# EAGLE board old_kaya-insolev1 (EAGLE 8.6.0)
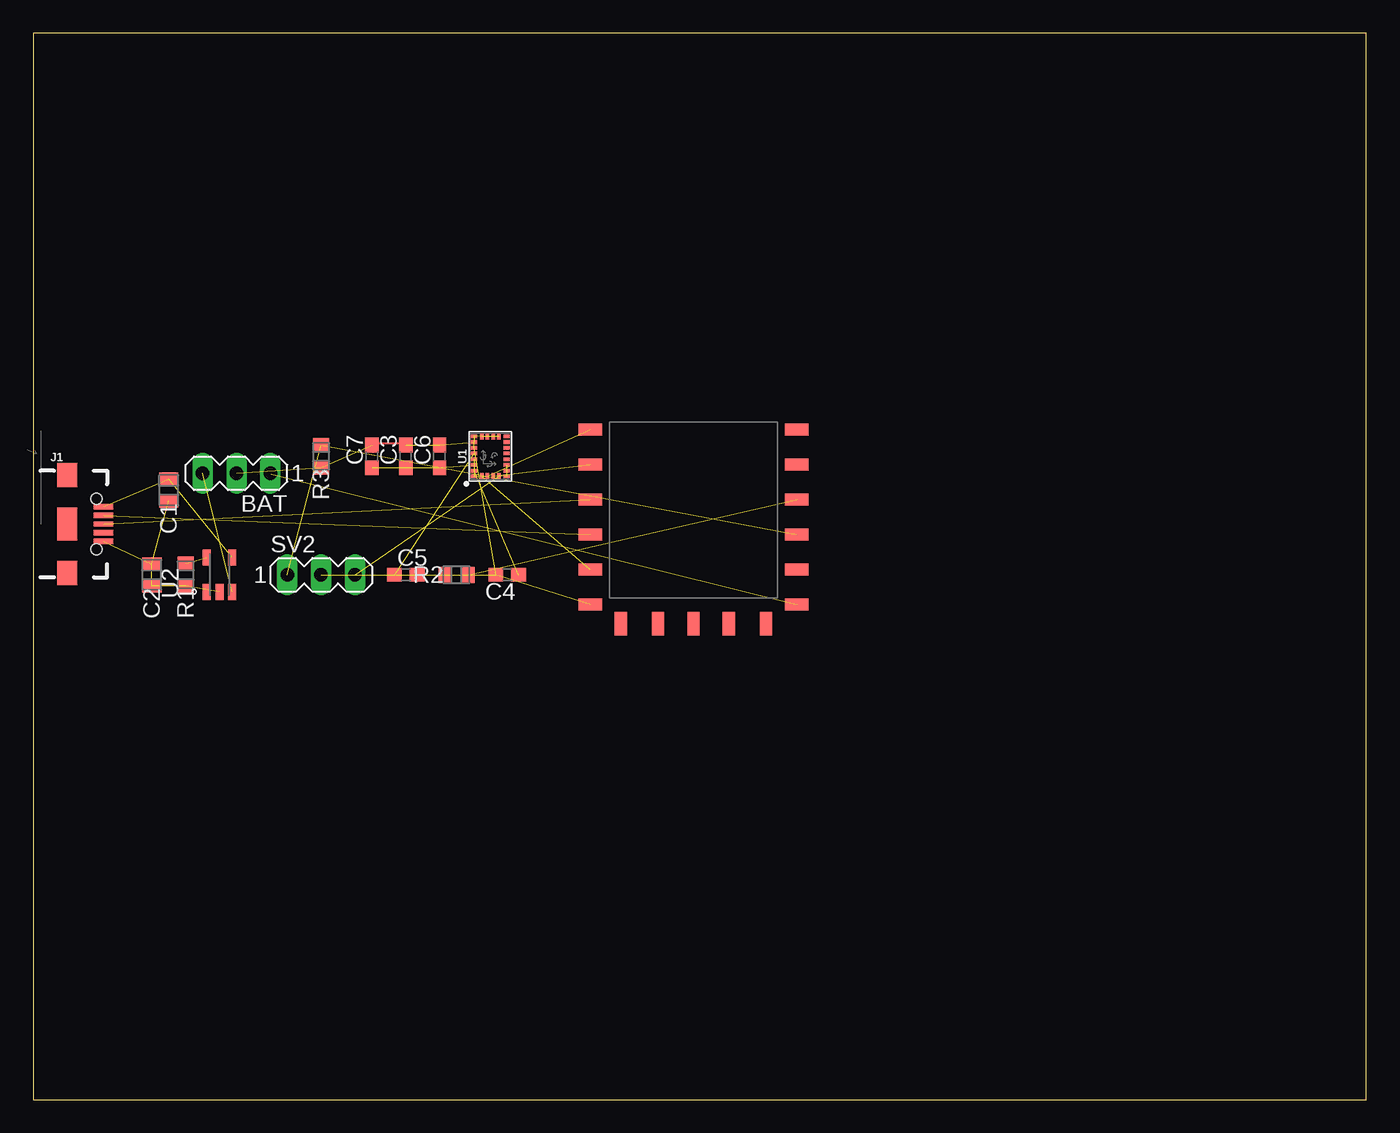
[diagram p0: board, top side]

Size 100 x 80 mm. Coordinates in mm from the lower left corner, seen from the top.
Outline: 0,0 100,0 100,80 0,80 0,0
Copper layers (1*16): Top 0.035mm / dielectric 1.5mm / Bottom 0.035mm
Design rules "default": minimum track width 6mil, minimum drill 0.35mm, track to track 6mil, track to pad 6mil, pad to pad 6mil, via to via 6mil, smd to smd 6mil, copper to edge 40mil, drill to drill 6mil, minimum pad ring 10mil, minimum via ring 8mil, stop-mask expansion 4mil, vias tented up to drill 0mil, thermal gap 10mil
tKeepout: area 43.2,36.8 to 55.9,50.8
bKeepout: area 43.2,36.8 to 55.9,50.8
tRestrict: area 43.2,36.8 to 55.9,50.8
bRestrict: area 43.2,36.8 to 55.9,50.8
vRestrict: area 43.2,36.8 to 55.9,50.8

## Footprints (pad centres in the part's own frame; a part is rotated, then mirrored left to right if it is on the bottom)
MA03-1 = drill 1.016 long: 1 -2.54,0; 2 0,0; 3 2.54,0
YAG_CC0805 = smd 0.965 x 1.448: 1 -0.826,0; 2 0.826,0
C0603 = smd 1.1 x 1: 1 -0.85,0; 2 0.85,0
USB-B-MICRO-SMD = smd 1.45 x 0.4: D+ 2.725,0; D- 2.725,0.65; GND 2.725,-1.3; ID 2.725,-0.65; VBUS 2.725,1.3 | smd 1.5 x 1.8: SHIELD1 0,3.685; SHIELD2 0,-3.685 | smd 1.5 x 2.5: SHIELD3 0,0 | hole 0.85: 2.2,1.9; 2.2,-1.9
RC0805N = smd 1.006 x 1.2: 1 -0.853,0; 2 0.853,0
LGA-24-3.5X3 = smd 0.27 x 0.45: 1 -1.505,1.225; 6 -1.505,-1.225; 7 -1.075,-1.225; 8 -0.645,-1.225; 9 -0.215,-1.225; 10 0.215,-1.225; 11 0.645,-1.225; 12 1.075,-1.225; 13 1.505,-1.225; 18 1.505,1.225; 19 1.075,1.225; 20 0.645,1.225; 21 0.215,1.225; 22 -0.215,1.225; 23 -0.645,1.225; 24 -1.075,1.225 | smd 0.45 x 0.27: 2 -1.475,0.645; 3 -1.475,0.215; 4 -1.475,-0.215; 5 -1.475,-0.645; 14 1.475,-0.645; 15 1.475,-0.215; 16 1.475,0.215; 17 1.475,0.645
SOT23-5 = smd 1.2 x 0.6: 1 -1.306,0.95; 2 -1.306,0; 3 -1.306,-0.95; 4 1.306,-0.95; 5 1.306,0.95
BLE-NANO-PKG = smd 1.778 x 0.914: A3 7.75,4.375; A4 7.75,1.75; GND$6 -7.75,-3.5; GND$8 7.75,-0.875; RXD -7.75,1.75; SCL -7.75,-0.875; SDA -7.75,7; SWCLK 7.75,9.625; SWDIO 7.75,7; TXD -7.75,4.375; VDD -7.75,9.625; VIN 7.75,-3.5 | smd 0.914 x 1.778: P06 2.65,-4.95; P07 5.45,-4.95; P15 0,-4.95; P28 -5.45,-4.95; P29 -2.65,-4.95

## Placement (x,y rotation side)
BAT  [MA03-1]  15.24,46.99 180 top
C1  CC0805ZRY5V6BB475  [YAG_CC0805]  10.16,45.72 90 top
C2  CC0805ZRY5V6BB475  [YAG_CC0805]  8.89,39.37 90 top
C3  .1u  [C0603]  27.94,48.26 90 top
C4  0.1u  [C0603]  35.56,39.37 180 top
C5  10n  [C0603]  27.94,39.37 0 top
C6  .1u  [C0603]  30.48,48.26 90 top
C7  10u  [C0603]  25.4,48.26 90 top
J1  [USB-B-MICRO-SMD]  2.54,43.18 0 top
R1  ERJ-6GEYJ203V  [RC0805N]  11.43,39.37 90 top
R2  ERJ-6GEYJ203V  [RC0805N]  31.75,39.37 0 top
R3  ERJ-6GEYJ203V  [RC0805N]  21.59,48.26 90 top
SV2  [MA03-1]  21.59,39.37 0 top
U1  LSM9DS1  [LGA-24-3.5X3]  34.29,48.26 90 top
U2  MCP73832T-2ACI/OT  [SOT23-5]  13.97,39.37 90 top
U$1  BLE-NANO  [BLE-NANO-PKG]  49.53,40.64 0 top

## Library data of the parts
BAT SV2 = con-lstb; OC_FARNELL: unknown; OC_NEWARK: unknown
C1 C2 = Yageo 4.7uF Cap; MANUFACTURER_PART_NUMBER: CC0805ZRY5V6BB475; VENDOR: Yageo
C3-C7 = rcl; SPICEPREFIX: C
J1 = SparkFun-Connectors; PROD_ID: CONN-11752
R1-R3 = Panasonic 20K Res; MANUFACTURER_PART_NUMBER: ERJ6GEYJ203V; VENDOR: Panasonic
U1 = SparkFun-Sensors; PROD_ID: IC-12536
U2 = MCP73832T-2ACI_OT; AVAILABILITY: Unavailable; MF: Microchip; MP: MCP73832T-2ACI-OT; PACKAGE: SOT-23-5 Microchip; PRICE: None
U$1 = BLE-NANO

## Nets
D+: J1.D+ U$1.TXD
D-: J1.D- U$1.RXD
N$1: C1.1 C2.1 C2.2 J1.GND R1.1 U2.2
N$2: BAT.2 C3.2 C4.2 C5.2 C6.2 C7.2 R2.1 R3.1 U1.14 U1.15 U1.16 U1.17 U1.18 U1.19 U1.20 U$1.GND$6
N$3: U1.4 U$1.SDA
N$4: U1.2 U$1.SCL
N$5: C4.1 U1.24
N$6: C5.1 U1.21
N$7: C3.1 C6.1 C7.1 U1.1 U1.3 U1.22 U1.23 U$1.VDD
N$8: C1.2 J1.VBUS U2.4
N$9: BAT.3 U2.3
N$11: R1.2 U2.5
N$13: R2.2 SV2.2 U$1.A3
N$14: R3.2 SV2.1 U$1.A4
VDD: SV2.3 U1.5 U1.6 U1.7 U1.8
VIN: BAT.1 U$1.VIN

## Tracks (layer width: path | path; a pad name or v marks a point on that pad's centre or on a via)
D+  (1 unrouted)
D-  (1 unrouted)
N$1  (5 unrouted)
N$2  (14 unrouted)
  Top 0.152: 33.07,49.78 U1.18 | C7.2 25.45,49.23 27.89,49.23 C3.2
N$3  (1 unrouted)
N$4  (1 unrouted)
N$5  (1 unrouted)
N$6  (1 unrouted)
N$7  (7 unrouted)
N$8  (2 unrouted)
N$9  (1 unrouted)
N$11  (1 unrouted)
N$13  (2 unrouted)
N$14  (2 unrouted)
VDD  (4 unrouted)
VIN  (1 unrouted)
  Top 0.152: 17.83,46.94 BAT.1